# Altium PCB esp32_pico_d4_motor_driverV4.PcbDoc_2022-05-04.pcbdoc
Units mil, origin at the board's own origin, x right, y up, seen from the top; angles counter-clockwise.
Board outline 1000.88 x 980 mil, 2 copper layers (Top Layer, Bottom Layer); 26 components, 51 nets, 138 pads, 29 vias.
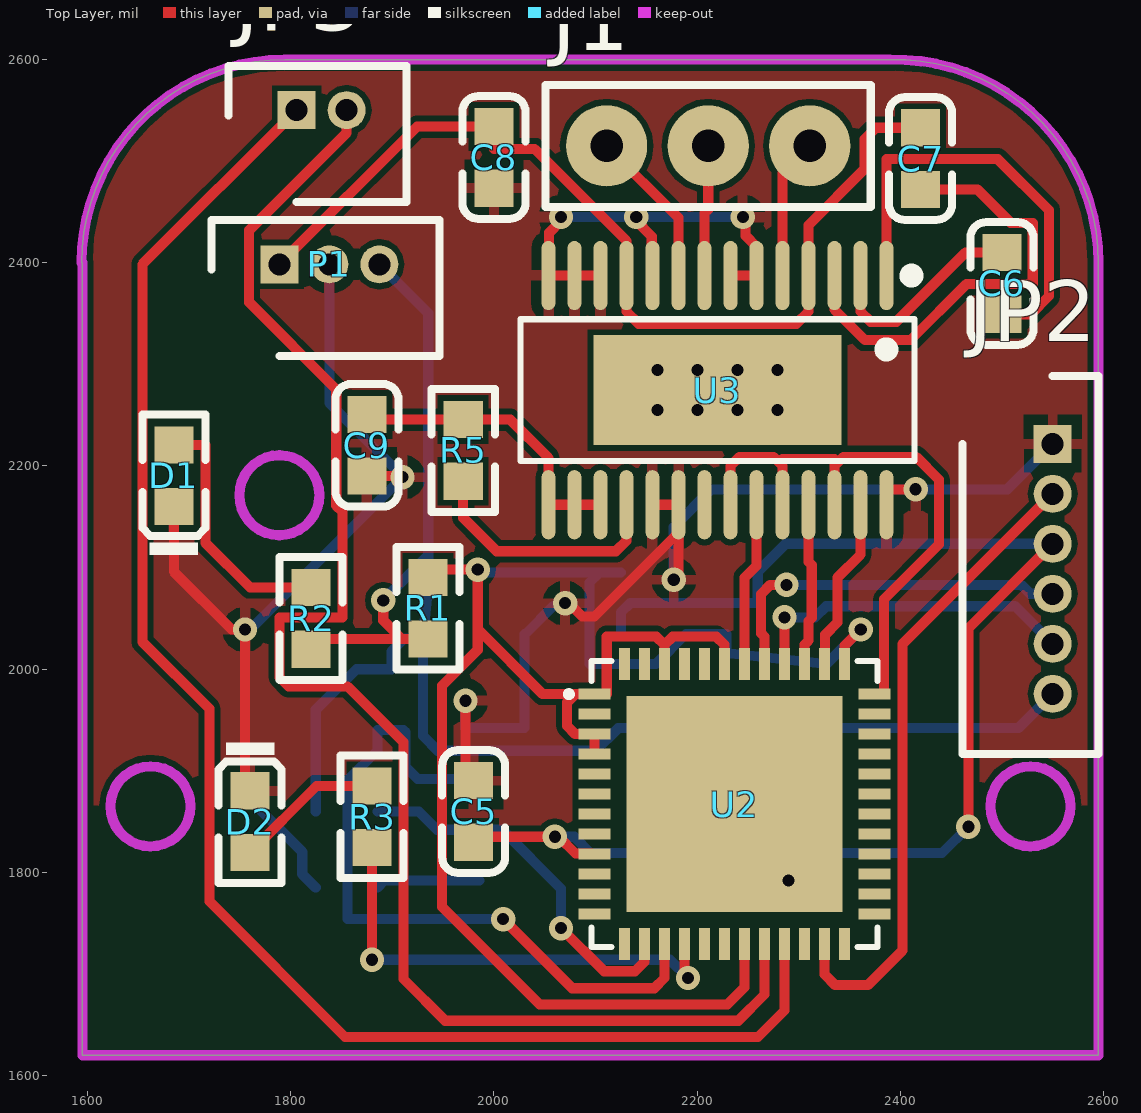
[diagram p0: Top Layer view]
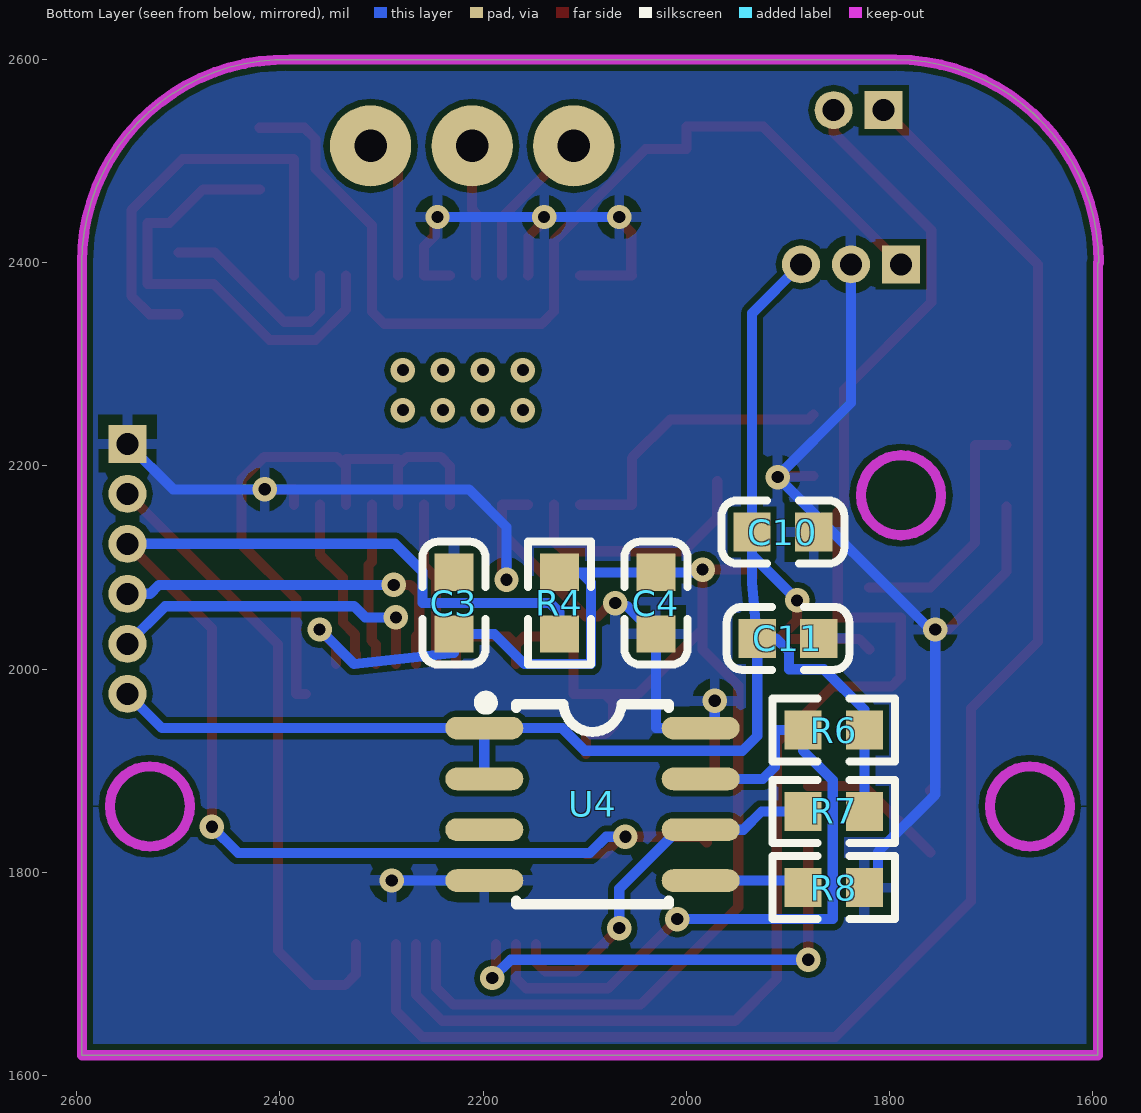
[diagram p1: Bottom Layer view, seen from below]

## Layer stack, top to bottom
Top Solder: solder mask 0.4, Solder Resist, Dk 3.5
Top Layer: signal copper 1.4
Dielectric1: dielectric 12.6, FR-4, Dk 4.8
Bottom Layer: signal copper 1.4
Bottom Solder: solder mask 0.4, Solder Resist, Dk 3.5

## Board outline
1595,1620 1595,2400 1594.12,2400 cw(c1794.12,2400) 1794.12,2600 1794.19,2599.93 2389.87,2599.93 cw(c2395,2400) 2595,2400 2595,1620

## Design rules (kind name [scope] priority, off if disabled: settings)
Clearance [All] p1: gap=6 ignorepadtopadclearanceinfootprint=FALSE
MinimumSolderMaskSliver [All] p1: minsoldermaskwidth=0
PolygonConnect [All] p1: connectstyle=Relief reliefconductorwidth=10 reliefentries=4 polygonreliefangle="90 Angle" airgapwidth=10
RoutingVias [All] p1: holewidth=12 width=24 viastyle="Through Hole" minholewidth=28 minwidth=50 maxholewidth=28 maxwidth=50
SilkToSilkClearance [All] p1: silktosilkclearance=0
SilkToSolderMaskClearance [IsPad] p1: minsilkscreentomaskgap=0 clearancetoexposedcopper=TRUE
SolderMaskExpansion [All] p1: expansion=4
Width [All] p1: maxlimit=10 minlimit=10 preferedwidth=10
27 further rules are at their usual default settings.

## Components (designator, comment, footprint, x,y, rotation, side; value= is the part's Value field where it differs from the comment)
C3 "10uF" 0603_C#1 2228.75,2065 r270 bottom
C4 "100nF" 0603_C#1 2030,2065 r90 bottom
C5 "1uF" 0603_C#1 1980,1860 r270 top
C6 "10nF" 0603_C#1 2500,2379.69 r270 top
C7 "100nF" 0603_C#1 2419.91,2502.56 r90 top
C8 "10uF" 0603_C#1 2000,2503.69 r90 top
C9 "1uF" 0603_C#1 1875,2220.32 r90 top
C10 "100nF" 0603_C#2 1905,2135 r180 bottom
C11 "10uF (106) 10% 10V" 0603_C#2 1900,2030.32 r180 bottom
D1 "蓝灯 0603" 0603_LED_S1 1685,2190.31 r90 top
D2 "蓝灯 0603" 0603_LED_S1 1760,1850.01 r270 top
J1 "90120-0763" 10.7MHZ 2310.86,2515 r180 top
JP2 "SPI1" SHDR6 2550,2221.85 r270 top
JP3 "Header 2" SHDR2 1805.79,2550.2 r180 top
P1 "TB002-500-03BE" SHDR3 1788.77,2398.46 r180 top
R1 "0Ω (0R0) ±1%" 0603_R#1 1935,2060 r270 top
R2 "2KΩ" 0603_R#1 1820,2050 r270 top
R3 "2KΩ" 0603_R#1 1880,1854.69 r270 top
R4 "10K" 0603_R#1 2125,2065 r90 bottom
R5 "10K" 0603_R#1 1969.69,2215.32 r270 top
R6 "10KΩ" 0603_R#2 1855,1940 r0 bottom
R7 "10K" 0603_R#2 1855,1860 r0 bottom
R8 "1K" 0603_R#2 1855,1785 r0 bottom
U2 "ESP32-PICO-D4" QFN-48_L7.0-W7.0-P0.50-BL-EP5.4 2247.65,1867.2 r270 top
U3 "DRV8313PWPR" HTSSOP-28_L9.8-W4.5-P0.65-LS6.6-BL-EP 2220,2275 r180 top
U4 "AS5600-ASOM" SOIC-8_L5.0-W4.0-P1.27-LS6.0-BL 2135,1840 r90 bottom

## Footprints (in the part's own frame and the unit in brackets; to place one, negate y for a bottom-side part, rotate by r counter-clockwise, add the part's x,y. Pads: shape width x height; smd on the part's side, far side on the other; paste and mask are expansions set on the pad)
10.7MHZ [mil]
  round 80 hole 32: 1(0,0) 2(200,0) 3(100,0)
  silkscreen extent -60,-60 260,60
0603_C#1 [mm]
  rect 0.93x0.98 smd: 1(-0.77,0) 2(0.77,0)
  silkscreen extent -1.53,-0.79 1.54,0.79
0603_C#2 [mm]
  rect 0.93x0.98 smd: 1(0.77,0) 2(-0.77,0)
  silkscreen extent -1.54,-0.79 1.53,0.79
0603_LED_S1 [mm]
  rect 0.93x0.98 smd: A(0.77,0) K(-0.77,0)
  silkscreen extent -1.98,-0.79 1.54,0.79
0603_R#1 [mm]
  rect 0.93x0.98 smd: 1(-0.77,0) 2(0.77,0)
  silkscreen extent -1.54,-0.79 1.54,0.79
0603_R#2 [mm]
  rect 0.93x0.98 smd: 1(0.77,0) 2(-0.77,0)
  silkscreen extent -1.54,-0.79 1.54,0.79
HTSSOP-28_L9.8-W4.5-P0.65-LS6.6-BL-EP [mm]
  oval 0.343x1.731 smd: 1(-4.225,-2.856) 2(-3.575,-2.856) 3(-2.925,-2.856) 4(-2.275,-2.856) 5(-1.625,-2.856) 6(-0.975,-2.856) 7(-0.325,-2.856) 8(0.325,-2.856) 9(0.975,-2.856) 10(1.625,-2.856) 11(2.275,-2.856) 12(2.925,-2.856) 13(3.575,-2.856) 14(4.225,-2.856) 15(4.225,2.875) 16(3.575,2.875) 17(2.925,2.875) 18(2.275,2.875) 19(1.625,2.875) 20(0.975,2.875) 21(0.325,2.875) 22(-0.325,2.875) 23(-0.975,2.875) 24(-1.625,2.875) 25(-2.275,2.875) 26(-2.925,2.875) 27(-3.575,2.875) 28(-4.225,2.875)
  rect 6.2x2.75 smd: 29(0,0.009)
  silkscreen extent -5,-3.01 4.93,1.78
QFN-48_L7.0-W7.0-P0.50-BL-EP5.4 [mm]
  rect 0.28x0.8 smd: 1(-2.75,-3.778) 2(-2.25,-3.778) 3(-1.75,-3.778) 4(-1.25,-3.778) 5(-0.75,-3.778) 6(-0.25,-3.778) 7(0.25,-3.778) 8(0.75,-3.778) 9(1.25,-3.778) 10(1.75,-3.778) 11(2.25,-3.778) 12(2.75,-3.778) 25(2.75,3.222) 26(2.25,3.222) 27(1.75,3.222) 28(1.25,3.222) 29(0.75,3.222) 30(0.25,3.222) 31(-0.25,3.222) 32(-0.75,3.222) 33(-1.25,3.222) 34(-1.75,3.222) 35(-2.25,3.222) 36(-2.75,3.222)
  rect 0.8x0.28 smd: 13(3.5,-3.028) 14(3.5,-2.527) 15(3.5,-2.028) 16(3.5,-1.527) 17(3.5,-1.028) 18(3.5,-0.527) 19(3.5,-0.028) 20(3.5,0.473) 21(3.5,0.972) 22(3.5,1.473) 23(3.5,1.972) 24(3.5,2.473) 37(-3.5,2.473) 38(-3.5,1.972) 39(-3.5,1.473) 40(-3.5,0.972) 41(-3.5,0.473) 42(-3.5,-0.028) 43(-3.5,-0.527) 44(-3.5,-1.028) 45(-3.5,-1.527) 46(-3.5,-2.028) 47(-3.5,-2.527) 48(-3.5,-3.028)
  rect 5.4x5.4 smd: 49(0,-0.277)
  silkscreen extent -3.58,-4.49 3.58,3.3
SHDR2 [mm]
  rect 0.95x0.95 hole 0.55: 1(0,0)
  round 0.95 hole 0.55: 2(-1.25,0)
  silkscreen extent -2.75,-1.11 1.7,2.29
SHDR3 [mm]
  rect 0.95x0.95 hole 0.55: 1(0,0)
  round 0.95 hole 0.55: 2(-1.25,0) 3(-2.5,0)
  silkscreen extent -4,-1.11 1.7,2.29
SHDR6 [mm]
  rect 0.95x0.95 hole 0.55: 1(0,0)
  round 0.95 hole 0.55: 2(1.25,0) 3(2.5,0) 4(3.75,0) 5(5,0) 6(6.25,0)
  silkscreen extent -1.7,-2.25 7.75,1.15
SOIC-8_L5.0-W4.0-P1.27-LS6.0-BL [mil]
  oval 22.38x76.78 smd: 1(101.98,63.89) 2(51.98,63.89) 3(1.98,63.89) 4(-48.02,63.89) 5(-48.02,-149.11) 6(1.98,-149.11) 7(51.98,-149.11) 8(101.98,-149.11)
  silkscreen extent -71,-118 133,68

## Part data
JP2: library part "HEADER 6"
JP3: "Header, 2-Pin"

## Via types
v1: diameter 24, hole 12, Top Layer to Bottom Layer, 21 vias
v2: diameter 24, hole 12, Top Layer to Bottom Layer, tented both sides, 8 vias

## Nets (pads, with @x,y where several pads share a name; then routed paths per layer and width w, separated by ;. In a path a pad name is that pad's centre, name@x,y a point inside that pad or via, vN(x,y) a via of type N, cw(c..) or ccw(c..) an arc to the next point about the centre after c; other vN are vias at no path point)
EN: C5.2 JP2.3 R4.1 U2.9 | length 1357.8
  Top Layer w10: C5.2 1985.31,1835 v1(2060,1835) 2063.79,1835 2080.29,1818.5 2095.5,1818.5 2096.01,1817.99 U2.9 ; v1(2467,1845) 2467,2040.42 JP2.3
  Bottom Layer w10: v1(2060,1835) 2079,1835 2095,1819 2441,1819 v1(2467,1845) ; R4.1 2125,2056 2134,2065 2259.63,2065 2259.63,2096 2287.05,2123.42 JP2.3
ENA: U2.36 U3.22 U3.24 U3.26 | length 595.1
  Top Layer w10: U3.22 2232.8,2200 2241.8,2209 2274.98,2209 2280.48,2203.5 ; U3.24 2283.98,2200 2280.48,2203.5 ; U3.26 2335.16,2200.16 ; U2.36 2384,1975.47 2384,2069 2438,2123 2438,2186.53 2415.53,2209 2411,2209 2344,2209 2338.58,2203.58 2335.16,2200.16 ; 2280.48,2203.5 2283.98,2207 2335.16,2207 2335.16,2200.16
FLASH_CLK: U2.31
FLASH_CS: U2.25
FLASH_SD0: U2.27
FLASH_SD1: U2.33
FLASH_SD2: U2.30
FLASH_SD3: U2.32
GND: C3.1 C4.1 C5.1 C8.1 C9.1 C10.1 C11.1 D1.K D2.K JP2.1 P1.2 R8.2 U2.49 U3.6 U3.7 U3.10 U3.12 U3.13 U3.14 U3.19 U3.20 U3.28 U4.4 U4.8 | length 2702.1
  Top Layer w10: D1.K 1685,2096 1742,2039 v1(1755,2039) 1755,1885.32 D2.K ; C9.1 v1@1909,2190 ; v1(1910,2189) v1@1909,2190 ; v1@1910,2190 v1@1909,2190 ; v1(1972,1969) 1972,1890.32 C5.1 ; v1(2066,2445) 2066,2441.21 2054.33,2429.54 2054.33,2388.13 U3.14 U3.13 U3.12 ; v1(2070,2065) 2073.79,2065 2086.92,2051.87 2099,2051.87 U3.20@2181.61,2134.48 ; v1(2140,2445) 2140,2441.21 2155.35,2425.86 2155.35,2388.13 U3.10 ; U3.19 U3.20 U3.20@2181.61,2134.48 ; v1(2177,2088) 2181.61,2092.61 U3.20@2181.61,2134.48 ; U3.7 U3.6 2258.39,2415.74 2247.68,2426.45 2247.68,2442.32 v1(2245,2445) ; U3.28 2386.34,2177 v1(2415,2177)
  Bottom Layer w10: R8.2 1811.37,1798.31 1811.37,1820.15 1755,1876.53 v1(1755,2039) 1760,2039 v1(1910,2189) ; P1.2 1837.99,2262.01 v1@1910,2190 ; v1(1972,1969) 1972,1941.98 U4.8 2030,1941.98 C4.1 2030.98,2034.69 2058.61,2062.32 2067.32,2062.32 v1(2070,2065) ; v1(2066,2445) v1(2140,2445) v1(2245,2445) ; v1(2177,2088) 2177,2140 2214,2177 v1(2415,2177) 2436,2177 2505.15,2177 JP2.1 ; U4.4 v1(2290,1791.98)
GPIO0: JP2.2 U2.23 | length 635.9
  Top Layer w10: U2.23 2325.31,1699.69 2336,1689 2368,1689 2402,1723 2402,2024.64 JP2.2
GPIO2: U2.22
GPIO4: U2.24
GPIO5: U2.34
GPIO9: U2.28
GPIO10: U2.29
GPIO12: U2.18
GPIO13: JP3.2 U2.20 | length 1512.2
  Top Layer w10: JP3.2 1855,2528 1759,2432 1759,2361 1844.71,2275.29 1844.71,2161 1851,2154.71 1851,2051 1789,2051 1789,1992 1798,1983 1856,1983 1911,1928 1911,1695 1952,1654 2240.54,1654 2266.26,1679.72 U2.20
GPIO14: U2.17
GPIO15: JP3.1 U2.21 | length 1566.3
  Top Layer w10: JP3.1 1654,2398.41 1654,2027 1720,1961 1720,1771.45 1853.45,1638 2259.94,1638 2285.94,1664 U2.21
GPIO18: U2.35
GPIO19: U2.38 U3.27 | length 171.5
  Top Layer w10: U2.38 2325.31,2015 2326,2015.69 2326,2034 2338,2046 2338,2090 2360.75,2112.75 U3.27
GPIO21: U2.42 U3.23 | length 161.7
  Top Layer w10: U2.42 2246.57,2090 2258.39,2101.82 U3.23
GPIO22: U2.39 U3.25 | length 161.2
  Top Layer w10: U2.39 2305.63,2024.09 2309.67,2028.12 2309.67,2047.18 2312.87,2050.38 2312.87,2102.32 2309.57,2105.62 U3.25
GPIO25: R7.1 U2.14 U4.6 | length 372
  Top Layer w10: v1(2066,1745.17) 2108.51,1702.65 2138.8,1702.65 2148.15,1712 U2.14
  Bottom Layer w10: R7.1 1926,1860 1944.02,1841.98 U4.6 2008.02,1841.98 2066,1784 v1(2066,1745.17)
GPIO26: R6.1 U2.15 U4.7 | length 716.2
  Top Layer w10: v1(2009,1754) 2077,1686 2157.83,1686 2167.83,1696 U2.15
  Bottom Layer w10: U4.7 1924.87,1891.98 1913.06,1903.79 1913.06,1937.94 1911,1940 R6.1 1885.31,1920 1856,1890.69 1856,1754 v1(2009,1754)
GPIO27: R3.2 U2.16 | length 463.7
  Top Layer w10: v1(1880,1714) R3.2 ; U2.16 2187.52,1699.48 v1(2191,1696)
  Bottom Layer w10: v1(1880,1714) 2173,1714 v1(2191,1696)
GPIO32: U2.12
GPIO33: U2.13
GPIO34: U2.10
GPIO35: U2.11
GPIO37: U2.7
GPIO38: U2.6
NetC6_1: C6.1 U3.2 | length 207
  Top Layer w10: U3.2 2360.75,2352 2370.75,2342 2396,2342 2464,2410 C6.1
NetC6_2: C6.2 U3.1 | length 433.4
  Top Layer w10: U3.1 2386.34,2502 2496,2502 2546.29,2451.71 2546.29,2367.32 2528.34,2349.37 C6.2
NetC7_1: C7.1 U3.3 | length 448.2
  Top Layer w10: U3.3 2335.16,2353.89 2365.05,2324 2410,2324 2465,2379 2530.29,2379 2530.29,2439.32 2508.68,2439.32 2475.76,2472.24 C7.1
NetC9_2: C9.2 R5.1 U3.15 U3.16 U3.17 | length 293.7
  Top Layer w10: C9.2 1880,2245.63 1924,2245.63 R5.1 2016.03,2245.63 2053.66,2208 U3.15 U3.16 U3.17
NetD1_A: D1.A R2.1 | length 249.5
  Top Layer w10: D1.A 1716,2220.63 1716,2124.31 1760,2080.31 R2.1
NetD2_A: D2.A R3.1 | length 147.1
  Top Layer w10: D2.A 1825.31,1885 R3.1
NetR5_2: R5.2 U3.18 | length 250.1
  Top Layer w10: R5.2 1969.69,2149 2002.69,2116 2120,2116 2130.43,2126.43 U3.18
NetR8_1: R8.1 U4.5 | length 103.5
  Bottom Layer w10: R8.1 1892.29,1791.98 1938.98,1791.98 U4.5
NetU2_2: U2.2
RXD: JP2.5 U2.40 | length 330
  Top Layer w10: U2.40 v1(2285.94,2051)
  Bottom Layer w10: v1(2285.94,2051) 2316,2051 2327,2062 2513,2062 JP2.5
SENSOR_VN: U2.8
SENSOR_VP: U2.5
TXD: JP2.4 U2.41 | length 364.8
  Top Layer w10: U2.41 2266.26,2032 2262.94,2035.32 2262.94,2074 2271.94,2083 v1(2288,2083)
  Bottom Layer w10: v1(2288,2083) 2519,2083 2527.79,2074.21 JP2.4
U: J1.1 U3.5 | length 138.7
  Top Layer w10: U3.5 2283.98,2488.12 J1.1
V: J1.3 U3.8 | length 129.1
  Top Layer w10: U3.8 2207.21,2449 2210.86,2452.65 J1.3
VDD3V3: C10.2 C11.2 JP2.6 P1.3 R1.2 R2.2 R6.2 R7.2 U4.1 U4.2 | length 1655.6
  Top Layer w10: R2.2 1830,2029.68 1909.32,2029.68 ; v1(1891,2067.68) 1891,2048 1909.32,2029.68 ; R1.2 1909.32,2029.68
  Bottom Layer w10: R7.2 R6.2 1824.68,1960 1864.68,2000 1899,2000 1899,2017.32 1912,2030.32 C11.2 ; P1.3 1935.32,2350.34 C10.2 1935.32,2112 ; v1(1891,2067.68) 1935.32,2112 ; U4.2 U4.1 ; JP2.6 2516.19,1941.98 U4.1 ; C11.2 1930.32,1934.18 1944.71,1919.79 2100,1919.79 2122.19,1941.98 U4.1 ; C11.2 1935.32,2085 1935.32,2112
VDD33: C3.2 C4.2 R1.1 R4.2 U2.1 U2.3 U2.4 U2.19 U2.37 U2.43 U2.46 | length 1838.3
  Top Layer w10: R1.1 1935,2098 v1(1984,2098) 1984,2039.47 ; U2.4 U2.3 2080,1936.1 2072,1944.1 2072,1967.47 2080,1975.47 ; U2.46 2167.83,2024 ; U2.43 2226.89,2024 2218.89,2032 2175.83,2032 2167.83,2024 ; U2.19 2246.57,1687 2229.57,1670 2045,1670 1949,1766 1949,1984 1984,2019 1984,2039.47 ; U2.37 2345,2023 v1(2361,2039) ; 1984,2039.47 2048,1975.47 2080,1975.47 ; 2080,1975.47 U2.1 2111,1975.47 2111,2032 2159.83,2032 2167.83,2024
  Bottom Layer w10: v1(1984,2098) 1986.68,2095.32 C4.2 2104,2095.32 ; R4.2 2104,2095.32 ; v1(2361,2039) 2327,2005 2228.75,2016 C3.2 2189,2034.68 2159.32,2005 2094,2005 2094,2085.32 2104,2095.32
VIN: C7.2 C8.2 P1.1 U3.4 U3.11 | length 968.2
  Top Layer w10: P1.1 1924.33,2534.01 C8.2 2000,2512 2040,2512 2130.43,2421.57 U3.11 2130.43,2352 2142.43,2340 2297.57,2340 2309.57,2352 U3.4 2309.57,2437 2365,2492.43 2365,2521.87 2376,2532.87 C7.2
W: J1.2 U3.9 | length 156.8
  Top Layer w10: J1.2 2181.61,2444.25 U3.9
pads on no net: U2.26 U2.44 U2.45 U2.47 U2.48 U3.21 U3.29 U4.3
copper on no net:
  other v2: 2160.94,2254.95 2200.31,2254.95 2239.68,2254.95 2279.05,2254.95 2160.94,2294.32 2200.31,2294.32 2239.68,2294.32 2279.05,2294.32

## Polygon pours and split planes (outlines as drawn)
GND on Bottom Layer "Bottom Layer-GND" (solid, remove dead copper, pour order 0): 1535,2645 2660,2645 2660,1545 1535,1545 1530,1540 1530,2650
GND on Top Layer "Top Layer-GND" (solid, remove dead copper, pour order 2): 1515,2665 2730,2665 2725,2660 2725,1500 1500,1500 1515,1515

## Keep-outs
Keep-Out Layer:
  lines w10: 1594.12,2400 cw(c1794.12,2400) 1794.12,2600 ; 1595,2400 1595,1620 2595,1620 2595,2400 ccw(c2395,2400) 2389.87,2599.93 1794.19,2599.93 ; 1701.3,1864.79 cw(c1661.93,1864.99) 1701.3,1865 ; 1828.14,2171.02 cw(c1788.77,2171.22) 1828.14,2171.23 ; 2567.44,1864.79 cw(c2528.07,1864.99) 2567.44,1865